# Altium PCB PDB_board.PcbDoc
Units mm, origin at the board's own origin, x right, y up, seen from the top; angles counter-clockwise.
Board outline 70 x 52 mm, 2 copper layers (Top Layer, Bottom Layer); 34 components, 21 nets, 124 pads, 15 vias.
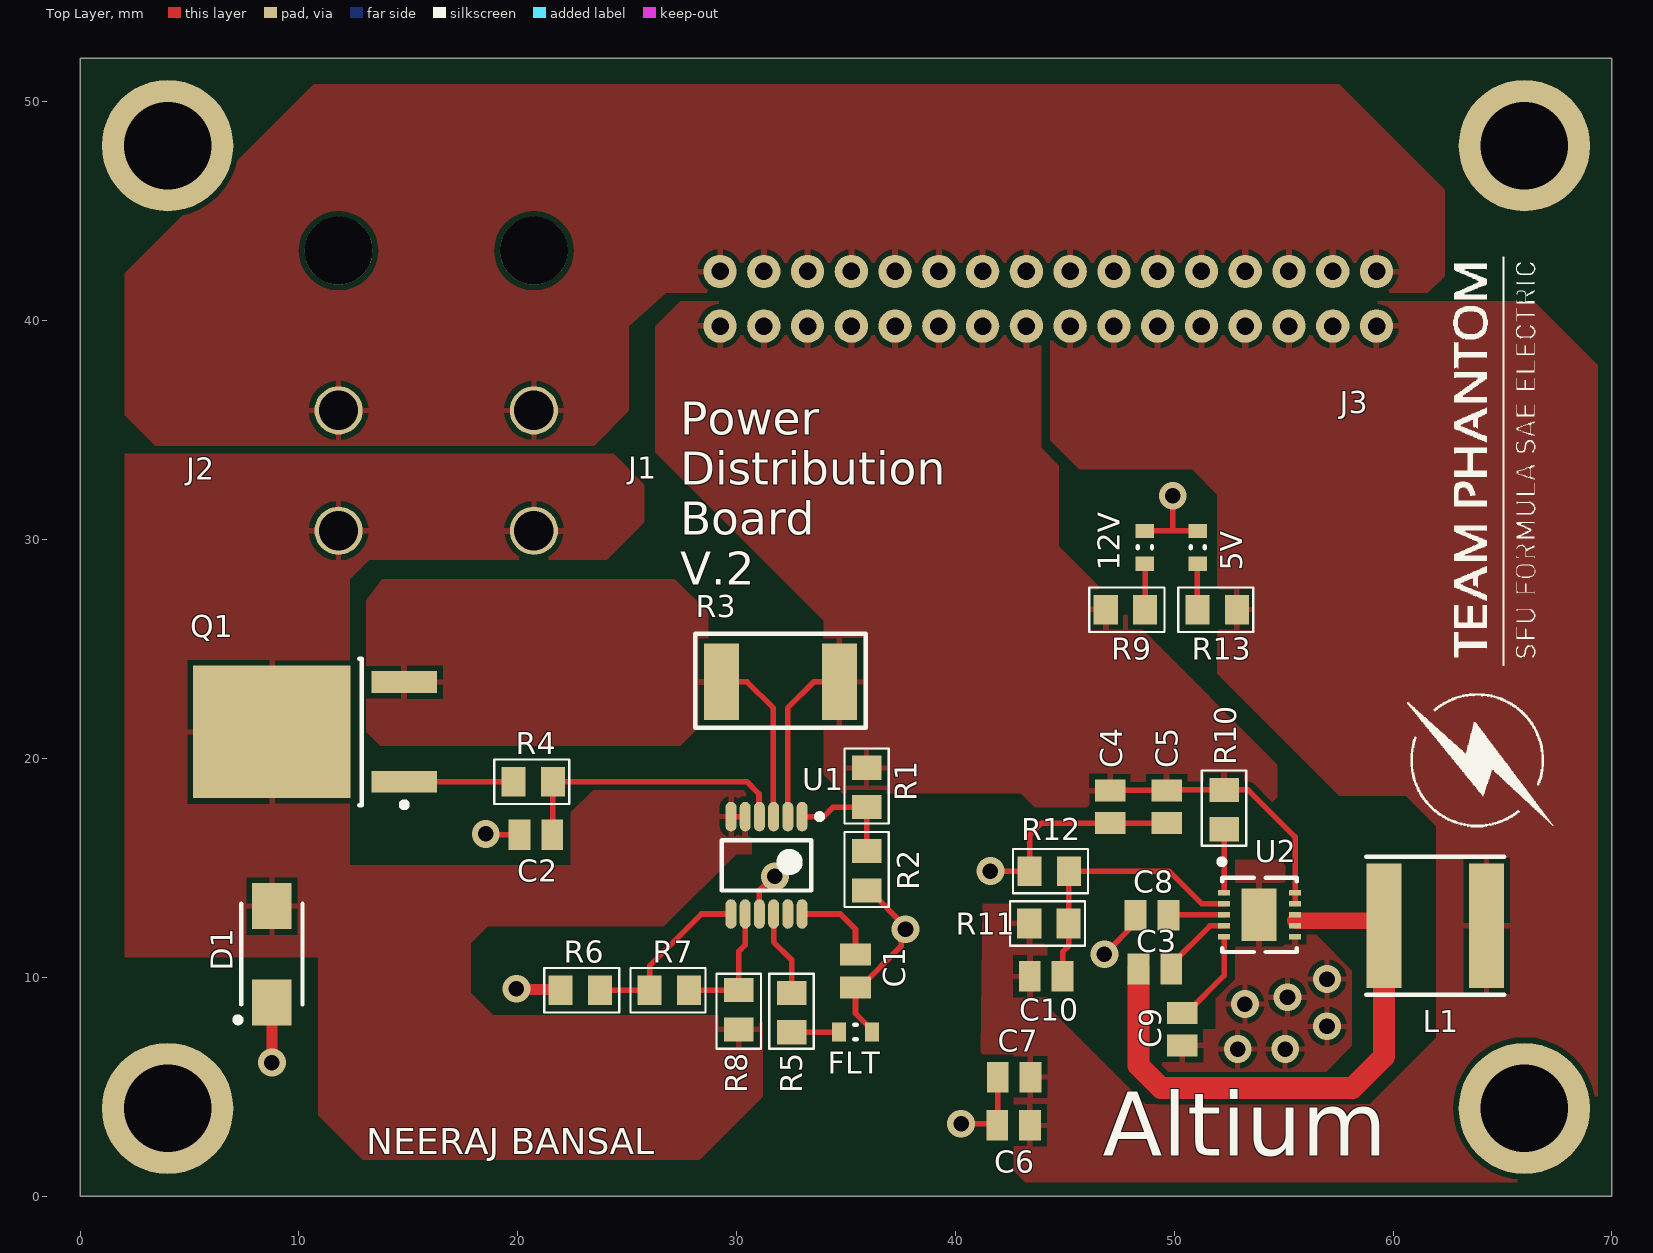
[diagram p0: Top Layer view]
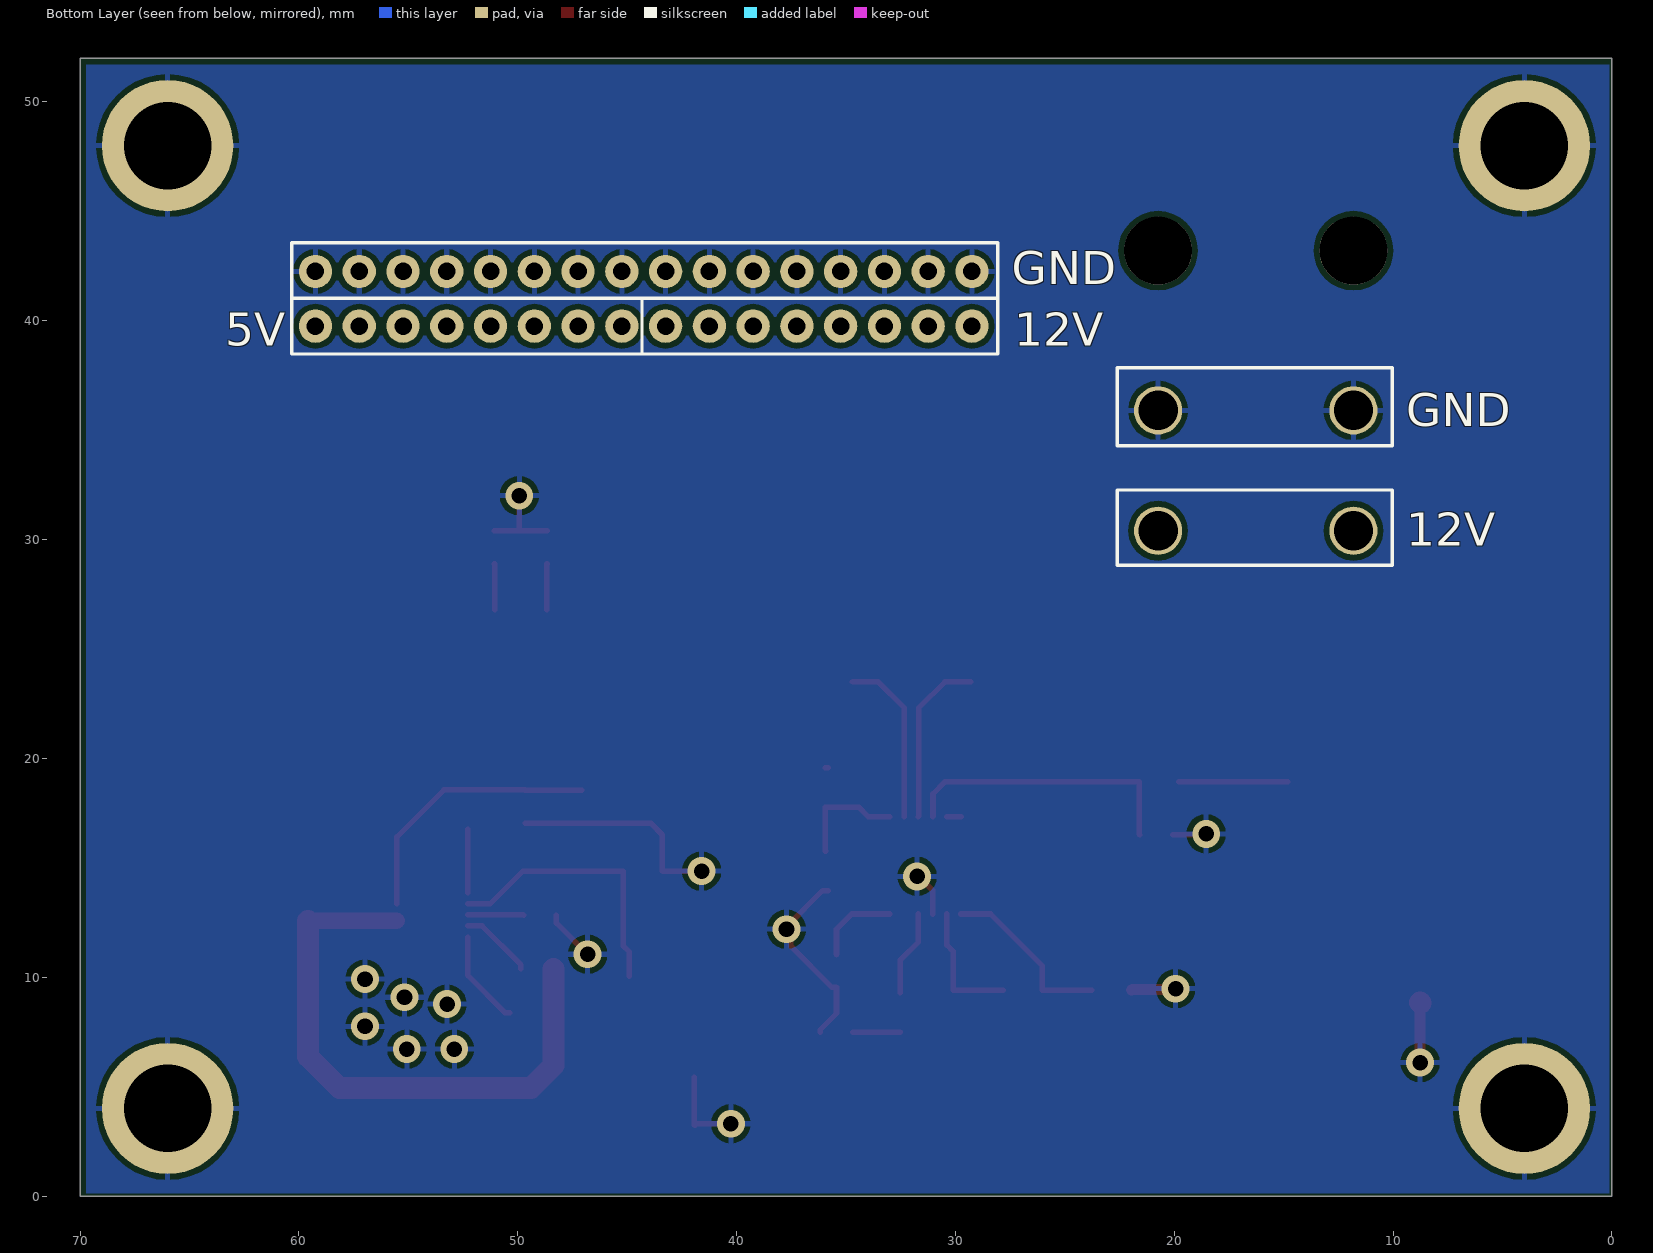
[diagram p1: Bottom Layer view, seen from below]
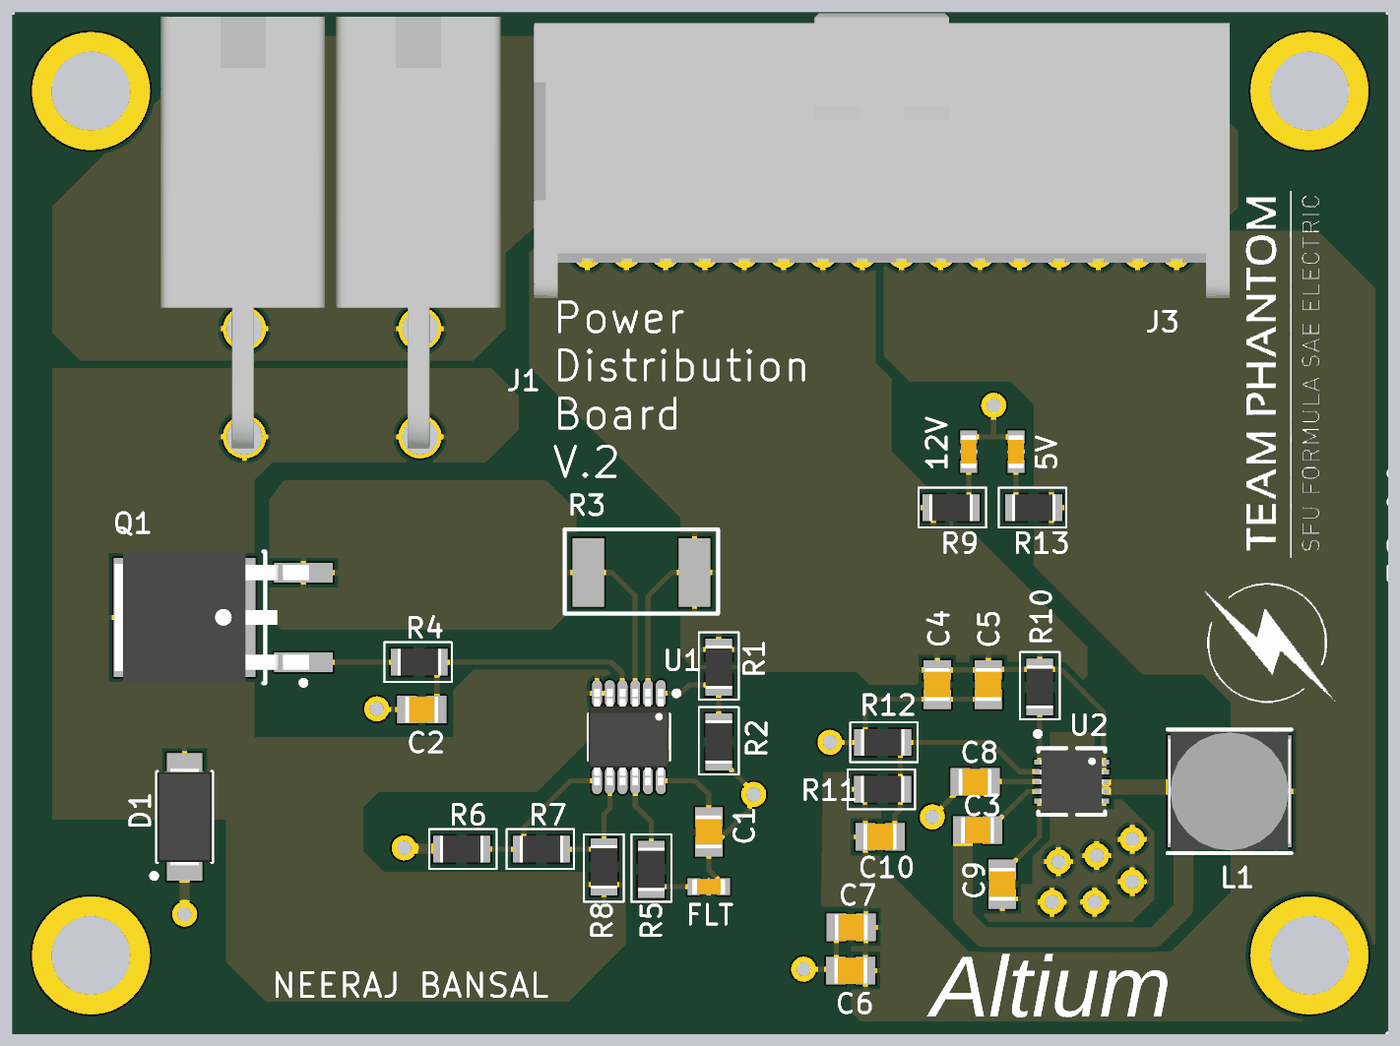
[diagram p2: 3D render of the assembled board from above, using the file's embedded part models]

## Layer stack, top to bottom
Top Solder: solder mask 0.0102, Solder Resist, Dk 3.5
Top Layer: signal copper 0.0356
Dielectric 1: dielectric 0.32, FR-4, Dk 4.8
Bottom Layer: signal copper 0.0356
Bottom Solder: solder mask 0.0102, Solder Resist, Dk 3.5

## Board outline
0,0 0,52 70,52 70,0

## Design rules (kind name [scope] priority, off if disabled: settings)
Clearance [All] p1: gap=0.254 ignorepadtopadclearanceinfootprint=FALSE except(0: Arc-Hole Track-Hole SMDPad-Hole THPad-Hole Via-Hole Fill-Hole Poly-Hole Region-Hole Text-Hole; 0.025: SMDPad-SMDPad; 0.1: Arc-Arc Arc-Track Arc-SMDPad Track-Track Track-SMDPad)
PolygonConnect [All] p1: connectstyle=Relief reliefconductorwidth=0.254 reliefentries=4 polygonreliefangle="90 Angle" airgapwidth=0.254
RoutingVias [All] p1: holewidth=0.711 width=1.27 viastyle="Through Hole" minholewidth=0.711 minwidth=1.27 maxholewidth=0.711 maxwidth=1.27
SolderMaskExpansion [All] p1: expansion=0.102
Width [All] p1: maxlimit=2 minlimit=0.254 preferedwidth=0.254 bottomlayer_maxwidth=0.254 minimp=50.000000 maximp=50.000000 favimp=50.000000
30 further rules are at their usual default settings.

## Classes and differential pairs
net class J3_Nets: 5V_OUT 12V_OUT GND
net class U2_Nets: 12V_OUT BOOTSTRAP_5V EN_5V FB_5V GND SS_5V SW_5V VREG_5V
net class U1_Nets: 12V_OUT +12V FB FLT GND IC_GATE NetU1_11 OV SNS TMR UV
net class R13_Nets: 5V_OUT NetLED3_1
net class R12_Nets: FB_5V GND
net class R11_Nets: 5V_OUT FB_5V
net class R10_Nets: 12V_OUT EN_5V
net class R9_Nets: 12V_OUT NetLED2_1
net class R8_Nets: +12V UV
net class R7_Nets: OV UV
net class R6_Nets: GND OV
net class R5_Nets: FLT NetLED1_1
net class R4_Nets: IC_GATE NetQ1_1
net class R3_Nets: 12V_OUT SNS
net class R2_Nets: FB GND
net class R1_Nets: 12V_OUT FB
net class Q1_Nets: +12V NetQ1_1 SNS
net class PDB_design_Nets: 5V_OUT 12V_OUT +12V BOOTSTRAP_5V EN_5V FB FB_5V FET_GATE FLT GND IC_GATE NetJ1_1 NetJ1_2 NetJ2_1 NetJ2_2 NetLED1_1 NetLED2_1 NetLED3_1 NetQ1_1 NetU1_11 OV SNS SS_5V SW_5V TMR UV VREG_5V
net class LED3_Nets: GND NetLED3_1
net class LED2_Nets: GND NetLED2_1
net class LED1_Nets: GND NetLED1_1
net class L1_Nets: 5V_OUT SW_5V
net class J2_Nets: +12V GND NetJ2_1 NetJ2_2
net class J1_Nets: +12V GND NetJ1_1 NetJ1_2
net class D1_Nets: +12V GND
net class C10_Nets: 5V_OUT FB_5V
net class C9_Nets: GND SS_5V
net class C8_Nets: GND VREG_5V
net class C7_Nets: 5V_OUT GND
net class C6_Nets: 5V_OUT GND
net class C5_Nets: 12V_OUT GND
net class C4_Nets: 12V_OUT GND
net class C3_Nets: BOOTSTRAP_5V SW_5V
net class C2_Nets: GND IC_GATE
net class C1_Nets: GND TMR

## Components (designator, comment, footprint, x,y, rotation, side; value= is the part's Value field where it differs from the comment)
5V "GREEN" LED 51.072,29.644 r90 top (schematic designator LED3)
12V "GREEN" LED 48.659,29.644 r90 top (schematic designator LED2)
C1 "0.1uF" CAPC1613X09N 35.433,10.287 r270 top
C2 "47nF" CAPC1613X09N 20.828,16.51 r0 top
C3 "0.1uF" CAPC1613X09N 49.112,10.376 r0 top
C4 "10uF" CAPC1613X09N 47.068,17.787 r90 top
C5 "10uF" CAPC1613X09N 49.653,17.787 r90 top
C6 "22pF" CAPC1613X09N 42.66,3.231 r180 top
C7 "22pF" CAPC1613X09N 42.684,5.435 r180 top
C8 "1uF" CAPC1613X09N 48.985,12.834 r0 top
C9 "47nF" CAPC1613X09N 50.37,7.622 r90 top
C10 "10pF" CAPC1613X09N 44.147,10.04 r0 top
D1 "TVS DIODE" DIODE_TVS 8.763,11.049 r90 top
FLT "RED" LED 35.433,7.493 r0 top (schematic designator LED1)
J1 "0768250002" MOLEX_2PIN_MEGAFIT 20.738,43.2 r180 top
J2 "0768250002" MOLEX_2PIN_MEGAFIT 11.811,43.2 r180 top
J3 "0559593230" MOLEX_32PIN 44.244,41 r0 top
L1 "3.3uH" IND-6mm 61.927,12.35 r180 top
Q1 "IRLR2908TRLPBF" DPAK 10.713,21.209 r180 top
R1 "42k" R0805 35.941,18.669 r270 top
R2 "5K" R0805 35.941,14.859 r270 top
R3 "0.01OHM" R2512 32.004,23.495 r0 top
R4 "10 ohm" R0805 20.701,18.929 r0 top
R5 "1K" R0805 32.512,8.382 r270 top
R6 "10K" R0805 22.86,9.409 r180 top
R7 "20K" R0805 26.924,9.409 r0 top
R8 "100K" R0805 30.099,8.509 r90 top
R9 "2.2k" R0805 47.77,26.797 r180 top
R10 "10K" R0805 52.275,17.66 r270 top
R11 "124k" R0805 44.274,12.453 r0 top
R12 "22.1k" R0805 44.285,14.849 r180 top
R13 "1K" R0805 51.961,26.797 r0 top
U1 "LT4363" TSOP65P490X110-12N 31.369,15.113 r270 top
U2 "AP65550FN-7" DFN-10 53.9,12.85 r270 top

## Footprints (in the part's own frame and the unit in brackets; to place one, negate y for a bottom-side part, rotate by r counter-clockwise, add the part's x,y. Pads: shape width x height; smd on the part's side, far side on the other; paste and mask are expansions set on the pad)
CAPC1613X09N [mm] "Chip Capacitor, 2-Leads, Body 1.60x1.30mm, IPC Medium Density"
  rect 1x1.4 smd: 1(-0.75,0) 2(0.75,0)
  body extent -0.85,-0.67 0.85,0.67, height 0.9
DFN-10 [mm] "QFN, 10-Leads, Body 3.00x3.00mm, Pitch 0.50mm, Thermal Pad 2.40x1.60mm, IPC Medium Density"
  rect 0.25x0.55 smd: 1(-1,-1.625) 2(-0.5,-1.625) 3(0,-1.625) 4(0.5,-1.625) 5(1,-1.625) 6(1,1.625) 7(0.5,1.625) 8(0,1.625) 9(-0.5,1.625) 10(-1,1.625)
  rect 2.4x1.6 smd: 11(0,-0.025)
  silkscreen extent -2.55,-1.85 1.7,1.7, body extent -1.55,-1.6 1.55,1.6, height 0.63
DIODE_TVS [mm] "Molded Diode, 2-Leads, Body 4.29x2.59mm, IPC Medium Density"
  rect 2.1x1.8 smd: 1(-2.2,0) 2(2.2,0)
  silkscreen extent -3.12,-1.4 2.3,1.67, body extent -2.52,-1.4 2.52,1.4, height 2.29
DPAK [mm] "D-PAK, 3-Pads, Body 6.21x6.73mm (max), IPC Medium Density"
  rect 3x1 smd: 1(-4.1,2.28) 3(-4.1,-2.28)
  rect 7.2x6.05 smd: 4(1.95,0)
  silkscreen extent -4.23,-3.35 -2.05,3.45, body extent -4.39,-3.37 5.52,3.37, height 2.52
IND-6mm [mm] "Precision Wire Wound Inductor, 2-Leads, Body 6.00x6.00mm, IPC Medium Density"
  rect 1.6x5.7 smd: 1(-2.35,0) 2(2.35,0)
  silkscreen extent -3.15,-3.15 3.15,3.15, body extent -3.1,-3 3.1,3, height 4.6
LED [mm] "Chip Capacitor, 2-Leads, Body 1.60x0.70mm, IPC Medium Density"
  rect 0.65x0.85 smd: 1(-0.75,0) 2(0.75,0)
  silkscreen extent -0.05,-0.33 0.05,0.33, body extent -0.85,-0.4 0.85,0.4, height 0.8
MOLEX_2PIN_MEGAFIT [mm]
  round 2.2 hole 1.8: 1(0,7.3) 2(0,12.8)
  round 3.1 hole 3.1: ""(0,0)
  body extent -4.1,-8.58 4.25,13.38, height 14.75
MOLEX_32PIN [mm]
  round 1.524 hole 0.8: 1(-15,1.25) 2(-13,1.25) 3(-11,1.25) 4(-9,1.25) 5(-7,1.25) 6(-5,1.25) 7(-3,1.25) 8(-1,1.25) 9(1,1.25) 10(3,1.25) 11(5,1.25) 12(7,1.25) 13(9,1.25) 14(11,1.25) 15(13,1.25) 16(15,1.25) 17(-15,-1.25) 18(-13,-1.25) 19(-11,-1.25) 20(-9,-1.25) 21(-7,-1.25) 22(-5,-1.25) 23(-3,-1.25) 24(-1,-1.25) 25(1,-1.25) 26(3,-1.25) 27(5,-1.25) 28(7,-1.25) 29(9,-1.25) 30(11,-1.25) 31(13,-1.25) 32(15,-1.25)
  body extent -17.7,-3.55 17.7,10.95, height 11.9
R0805 [mm] "Chip Resistor, 2-Leads, Body 2.09x1.30mm, IPC Medium Density"
  rect 1.1x1.35 smd: 1(-0.9,0) 2(0.9,0)
  silkscreen extent -1.78,-1.02 1.65,1.02, body extent -1.1,-0.67 1.1,0.67, height 0.6
R2512 [mm]
  rect 1.6x3.5 smd: 1(-2.7,0) 2(2.7,0)
  silkscreen extent -3.9,-2.1 3.9,2.2
TSOP65P490X110-12N [mm] "TSOP, 12-Leads, Body 4.04x3.00mm, Pitch 0.65mm, IPC Medium Density"
  oval 1.35x0.5 smd: 1(-2.225,1.625) 2(-2.225,0.975) 3(-2.225,0.325) 4(-2.225,-0.325) 5(-2.225,-0.975) 6(-2.225,-1.625) 7(2.225,-1.625) 8(2.225,-0.975) 9(2.225,-0.325) 10(2.225,0.325) 11(2.225,0.975) 12(2.225,1.625)
  silkscreen extent -2.35,-2.05 1.15,2.55, body extent -2.45,-2.05 2.45,2.05, height 1.1

## Part data
5V 12V: library part 150060VS75000, "LED GREEN CLEAR 0603 SMD", Case/Package=0603, Case Code (Metric)=1608, Colour=Green, Forward Current=30mA, Forward Voltage=2V, Manufacturer="Wurth Electronics", Max Operating Temperature=85°C, Min Operating Temperature=-40°C, Package Quantity=1, Supplier Part Number 1=732-4980-1-ND, Test Current=20mA, Case Code (Imperial)=0603, ComponentLink1Description=http://www.farnell.com/datasheets/1911347.pdf, ComponentLink1URL=http://www.farnell.com/datasheets/1911347.pdf, ComponentLink2Description=https://katalog.we-online.de/led/datasheet/150060VS75000.pdf, ComponentLink2URL=https://katalog.we-online.de/led/datasheet/150060VS75000.pdf, ComponentLink3Description=https://www.distrelec.biz/Web/Downloads/_t/ds/150060VS75000_eng_tds.pdf?mime=application%2Fpdf, ComponentLink3URL=https://www.distrelec.biz/Web/Downloads/_t/ds/150060VS75000_eng_tds.pdf?mime=application%2Fpdf, ComponentLink4Description=http://www.produktinfo.conrad.com/datenblaetter/750000-774999/759431-da-01-en-CHIPLED_0603_W_KL_H_GRUEN_150060VS7500.pdf, ComponentLink4URL=http://www.produktinfo.conrad.com/datenblaetter/750000-774999/759431-da-01-en-CHIPLED_0603_W_KL_H_GRUEN_150060VS7500.pdf, Dominant Wavelength=570nm, Height=0.7mm, Length=1.6mm, Lens Style=Clear,Rectangular, Luminous Intensity=40mcd, Manufacturer Part Number=150060VS75000, Mount="Surface Mount", Number of Pins=2, Packaging="Tape and Reel", Pricing 1="1=0.14, 50=0.129, 100=0.11, 500=0.095 (USD)", REACH SVHC=Unknown, Stock 1=219425, Supplier 1=Digi-Key, Viewing Angle=140°, Wavelength=570nm, Width=0.8mm
C1 C3: library part CL10A104KA8NNNC, "0.1µF ±10% 25V Ceramic Capacitor X5R 0603 (1608 Metric)", Capacitance=47nF, Case/Package=0603, Case Code (Metric)=1608, Dielectric=X7R, Manufacturer=Murata, Manufacturer Part Number=GCM188R71H473KA55D, Max Operating Temperature=125°C, Min Operating Temperature=-55°C, Package Quantity=1, Ratings=AEC-Q200, Tolerance=10%, Voltage=50V, Case Code (Imperial)=0603, Depth=0.8mm, Height=0.8mm, Lead Free="Lead Free", Length=1.6mm, Mount="Surface Mount", Packaging="Tape and Reel", Radiation Hardening=No, REACH SVHC="No SVHC", Supplier 1=Digi-Key, Termination=SMD/SMT, Thickness=0.035inch, Voltage Rating=50V, Voltage Rating (DC)=50V, Width=0.031inch
C2 C9: library part GCM188R71H473KA55D, "CAP CER 0.047UF 50V X7R 0603", Case/Package=0603, Case Code (Metric)=1608, Dielectric=X7R, Manufacturer=Murata, Max Operating Temperature=125°C, Min Operating Temperature=-55°C, Package Quantity=1, Ratings=AEC-Q200, Supplier Part Number 1=490-4934-1-ND, Tolerance=10%, Voltage=50V, Capacitance=47nF, Case Code (Imperial)=0603, Depth=0.8mm, Height=0.8mm, Lead Free="Lead Free", Length=1.6mm, Manufacturer Part Number=GCM188R71H473KA55D, Mount="Surface Mount", Packaging="Tape and Reel", Pricing 1="1=0.16, 10=0.115, 100=0.054, 500=0.03788, 1000=0.03136 (USD)", Radiation Hardening=No, REACH SVHC="No SVHC", Stock 1=40000, Supplier 1=Digi-Key, Termination=SMD/SMT, Thickness=0.035inch, Voltage Rating=50V, Voltage Rating (DC)=50V, Width=0.031inch
C4 C5: library part GRM21BR71A106KA73L, "10µF ±10% 10V Ceramic Capacitor X7R 0805 (2012 Metric)", Capacitance=47nF, Case/Package=0603, Case Code (Metric)=1608, Dielectric=X7R, Manufacturer=Murata, Manufacturer Part Number=GCM188R71H473KA55D, Max Operating Temperature=125°C, Min Operating Temperature=-55°C, Package Quantity=1, Ratings=AEC-Q200, Tolerance=10%, Voltage=50V, Case Code (Imperial)=0603, Depth=0.8mm, Height=0.8mm, Lead Free="Lead Free", Length=1.6mm, Mount="Surface Mount", Packaging="Tape and Reel", Radiation Hardening=No, REACH SVHC="No SVHC", Supplier 1=Digi-Key, Termination=SMD/SMT, Thickness=0.035inch, Voltage Rating=50V, Voltage Rating (DC)=50V, Width=0.031inch
C6 C7: library part CL31B226KPHNNNE, "22µF ±10% 10V Ceramic Capacitor X7R 1206 (3216 Metric)", Capacitance=47nF, Case/Package=0603, Case Code (Metric)=1608, Dielectric=X7R, Manufacturer=Murata, Manufacturer Part Number=GCM188R71H473KA55D, Max Operating Temperature=125°C, Min Operating Temperature=-55°C, Package Quantity=1, Ratings=AEC-Q200, Tolerance=10%, Voltage=50V, Case Code (Imperial)=0603, Depth=0.8mm, Height=0.8mm, Lead Free="Lead Free", Length=1.6mm, Mount="Surface Mount", Packaging="Tape and Reel", Radiation Hardening=No, REACH SVHC="No SVHC", Supplier 1=Digi-Key, Termination=SMD/SMT, Thickness=0.035inch, Voltage Rating=50V, Voltage Rating (DC)=50V, Width=0.031inch
C8: library part CL21B105KBFVPNE, "1µF ±10% 50V Ceramic Capacitor X7R 0805 (2012 Metric)", Capacitance=47nF, Case/Package=0603, Case Code (Metric)=1608, Dielectric=X7R, Manufacturer=Murata, Manufacturer Part Number=GCM188R71H473KA55D, Max Operating Temperature=125°C, Min Operating Temperature=-55°C, Package Quantity=1, Ratings=AEC-Q200, Tolerance=10%, Voltage=50V, Case Code (Imperial)=0603, Depth=0.8mm, Height=0.8mm, Lead Free="Lead Free", Length=1.6mm, Mount="Surface Mount", Packaging="Tape and Reel", Radiation Hardening=No, REACH SVHC="No SVHC", Supplier 1=Digi-Key, Termination=SMD/SMT, Thickness=0.035inch, Voltage Rating=50V, Voltage Rating (DC)=50V, Width=0.031inch
C10: library part C0805C100K5RAC7800, "10pF ±10% 50V Ceramic Capacitor X7R 0805 (2012 Metric)", Capacitance=47nF, Case/Package=0603, Case Code (Metric)=1608, Dielectric=X7R, Manufacturer=Murata, Manufacturer Part Number=GCM188R71H473KA55D, Max Operating Temperature=125°C, Min Operating Temperature=-55°C, Package Quantity=1, Ratings=AEC-Q200, Tolerance=10%, Voltage=50V, Case Code (Imperial)=0603, Depth=0.8mm, Height=0.8mm, Lead Free="Lead Free", Length=1.6mm, Mount="Surface Mount", Packaging="Tape and Reel", Radiation Hardening=No, REACH SVHC="No SVHC", Supplier 1=Digi-Key, Termination=SMD/SMT, Thickness=0.035inch, Voltage Rating=50V, Voltage Rating (DC)=50V, Width=0.031inch
D1: library part SMAJ58A-13-F, "TVS DIODE 58VWM 93.6VC SMA", Breakdown Voltage=64.4V, Capacitance=180pF, Case/Package=SMA, Clamping Voltage=93.6V, Current=43A, Forward Voltage=3.5V, Leakage Current=5uA, Manufacturer=Diodes, Max Breakdown Voltage=71.2V, Max Operating Temperature=150°C, Max Output Current=4.3A, Max Power Dissipation=400W, Max Surge Current=40A, Min Operating Temperature=-55°C, Package Quantity=5000, Power Line Protection=No, Reverse Standoff Voltage=58V, Supplier Part Number 1=SMAJ58A-13-FDIDKR-ND, Test Current=1mA, Composition=Zener, Contact Plating=Matte,Tin, Direction=Unidirectional, Element Configuration=Single, ESD Protection=No, Height=2.3mm, Lead Free="Lead Free", Length=2.92mm, Manufacturer Part Number=SMAJ58A-13-F, Max Reverse Leakage Current=5uA, Min Breakdown Voltage=64.4V, Mount="Surface Mount", Number of Elements=1, Number of Pins=2, Number of Unidirectional Channels=1, Packaging="Tape and Reel", Peak Pulse Current=4.3A, Peak Pulse Power=400W, Polarity=Unidirectional, Power Dissipation=400W, Pricing 1="1=0.41, 10=0.311, 100=0.1937, 500=0.13256, 1000=0.10197 (USD)", Radiation Hardening=No, Reverse Breakdown Voltage=64.4V, Stock 1=387453, Supplier 1=Digi-Key, Termination=SMD/SMT, Voltage=58V, Width=4.6mm, Working Voltage=58V
FLT: library part QTLP600CRTR, "Red  LED Indication - Discrete 2V 0603 (1608 Metric)", Case/Package=0603, Case Code (Metric)=1608, Colour=Green, Forward Current=30mA, Forward Voltage=2V, Manufacturer="Wurth Electronics", Manufacturer Part Number=150060VS75000, Max Operating Temperature=85°C, Min Operating Temperature=-40°C, Package Quantity=1, Test Current=20mA, Case Code (Imperial)=0603, ComponentLink1Description=http://www.farnell.com/datasheets/1911347.pdf, ComponentLink1URL=http://www.farnell.com/datasheets/1911347.pdf, ComponentLink2Description=https://katalog.we-online.de/led/datasheet/150060VS75000.pdf, ComponentLink2URL=https://katalog.we-online.de/led/datasheet/150060VS75000.pdf, ComponentLink3Description=https://www.distrelec.biz/Web/Downloads/_t/ds/150060VS75000_eng_tds.pdf?mime=application%2Fpdf, ComponentLink3URL=https://www.distrelec.biz/Web/Downloads/_t/ds/150060VS75000_eng_tds.pdf?mime=application%2Fpdf, ComponentLink4Description=http://www.produktinfo.conrad.com/datenblaetter/750000-774999/759431-da-01-en-CHIPLED_0603_W_KL_H_GRUEN_150060VS7500.pdf, ComponentLink4URL=http://www.produktinfo.conrad.com/datenblaetter/750000-774999/759431-da-01-en-CHIPLED_0603_W_KL_H_GRUEN_150060VS7500.pdf, Dominant Wavelength=570nm, Height=0.7mm, Length=1.6mm, Lens Style=Clear,Rectangular, Luminous Intensity=40mcd, Mount="Surface Mount", Number of Pins=2, Packaging="Tape and Reel", REACH SVHC=Unknown, Supplier 1=Digi-Key, Viewing Angle=140°, Wavelength=570nm, Width=0.8mm
J1 J2: "CONN_2Position_MEGAFIT Molex Through Hole, Right Angle Tin", Colour=Black, Manufacturer=Molex, Supplier Part Number 1=WM11969-ND, ComponentLink1Description=http://www.molex.com/pdm_docs/ps/PS-76823-100.pdf, ComponentLink1URL=http://www.molex.com/pdm_docs/ps/PS-76823-100.pdf, Connector Type="Male Pin", Contact Plating=Tin, Fastening Type=Ramp, Manufacturer Part Number=0768250002, Mount="Through Hole", Number of Positions=2, Number of Rows=2, Packaging=Tray, Pricing 1="1=1.08, 10=0.946, 25=0.89, 50=0.853, 100=0.816, 250=0.7418, 500=0.6676, 1000=0.5934, 2500=0.5378 (USD)", Row Spacing=0.224inch, Stock 1=2862, Supplier 1=Digi-Key, Termination=Solder
L1: library part 1264EY-3R3N=P3, "IND 3.3µH 6.5A 25.2 mOhm Max Nonstandard", Case/Package=Nonstandard, Current Rating=6.5A, DC Resistance (DCR)=25.2mR, Inductance=3.3uh, Manufacturer=Murata, Manufacturer Part Number=1264EY-3R3N=P3, Supplier Part Number 1=490-10821-1-ND, Test Frequency=100kHz, Tolerance=30%, Composition=Wirewound, Core Material=Ferrite, Height - Seated (Max)=0.198inch, Length=0.248inch, Mount="Surface Mount", Packaging="Tape and Reel", Pricing 1="1=0.51, 10=0.443, 100=0.3163, 500=0.2657 (USD)", Shielding=Shielded, Stock 1=81, Supplier 1=Digi-Key, Width=0.248inch
Q1: "MOSFET N-CH 80V 30A DPAK", Case/Package=DPAK, Continuous Drain Current (ID)=39A, Drain to Source Breakdown Voltage=80V, Drain to Source Resistance=28mR, Gate to Source Voltage (Vgs)=16V, Input Capacitance=1.89nF, Manufacturer="International Rectifier", Max Operating Temperature=175°C, Max Power Dissipation=120W, Min Operating Temperature=-55°C, On-State Resistance=28MR, Package Quantity=1, Supplier Part Number 1=IRLR2908TRLPBFDKR-ND, Threshold Voltage=1V, Drain to Source Voltage (Vdss)=80V, Element Configuration=Single, Fall Time=55ns, Height=2.26mm, Length=6.73mm, Manufacturer Part Number=IRLR2908TRLPBF, Mount="Surface Mount", Nominal Vgs=1V, Number of Elements=1, Number of Pins=3, Packaging="Tape and Reel", Power Dissipation=120W, Pricing 1="1=1.4, 10=1.239, 100=0.9794, 500=0.75958, 1000=0.59966 (USD)", Radiation Hardening=No, Rds On Max=28mR, REACH SVHC="No SVHC", Rise Time=95ns, Stock 1=4490, Supplier 1=Digi-Key, Turn-Off Delay Time=36ns, Turn-On Delay Time=12ns, Width=6.22mm
R1: library part RNCF0805DTE10K0_2_2, Case/Package=0805, Case Code (Metric)=2012, Manufacturer="Stackpole Electronics", Manufacturer Part Number=RNCF0805DTE10K0, Max Operating Temperature=155°C, Max Power Dissipation=125mW, Min Operating Temperature=-55°C, Resistance=10kR, Temperature Coefficient=25ppm/°C, Tolerance=0.5%, Case Code (Imperial)=0805, Composition="Thin Film", Contact Plating=Matte,Tin, Depth=1.25mm, Features="Moisture Resistant", Height=0.026inch, Length=2mm, Military Standard=Not, Mount="Surface Mount", Number of Terminations=2, Packaging="Tape and Reel", Radiation Hardening=No, Width=0.049inch
R2: library part PNM0805E5001BST5, "5 kOhms ±0.1% 0.2W, 1/5W Chip Resistor 0805 (2012 Metric) Anti-Sulfur, Moisture Resistant, Non-Inductive, Non-Magnetic Thin Film", Case/Package=0805, Case Code (Metric)=2012, Manufacturer="Vishay Dale Thin Film", Max Operating Temperature=125°C, Min Operating Temperature=-55°C, Power Rating=200mW, Resistance=5kR, Supplier Part Number 1=1857222, Temperature Coefficient=25ppm/°C, Tolerance=0.1%, Voltage Rating=100V, Case Code (Imperial)=0805, Composition="Thin Film", Height=0.015inch, Length=0.08inch, Manufacturer Part Number=PNM0805E5001BST5, Packaging="Tape and Reel", Pricing 1="1=2.59, 10=1.9, 50=1.53, 100=1.36 (GBP)", Radiation Hardening=No, REACH SVHC=Unknown, Stock 1=1231, Supplier 1=Farnell, Voltage Rating (DC)=100V, Width=0.05inch
R3: library part PE2512FKE7W0R01L, "RES SMD 0.01 OHM 1% 2W 2512", Case/Package=2512, Case Code (Metric)=6432, Manufacturer=Yageo, Max Operating Temperature=170°C, Max Power Dissipation=2W, Min Operating Temperature=-55°C, Resistance=10mR, Temperature Coefficient=50ppm/°C, Tolerance=1%, Case Code (Imperial)=2512, Composition="Metal Film", Features="Automotive AEC-Q200,Moisture Resistant", Height=0.03inch, Lead Free="Lead Free", Length=0.248inch, Manufacturer Part Number=PE2512FKE7W0R01L, Number of Terminations=2, Packaging="Tape and Reel", Supplier 1=Digi-Key, Width=0.122inch
R4: library part RL1220S-100-F, "RES SMD 10 OHM 1% 1/3W 0805", Case/Package=0805, Case Code (Metric)=2012, Manufacturer=Susumu, Max Operating Temperature=125°C, Max Power Dissipation=333mW, Min Operating Temperature=-55°C, Package Quantity=1, Power Rating=250mW, Resistance=10R, Supplier Part Number 1=754-RL1220S-100-F, Temperature Coefficient=200ppm/°C, Tolerance=1%, Voltage Rating (DC)=100V, Case Code (Imperial)=0805, Composition="Thin Film", Height=0.02inch, Lead Free="Lead Free", Length=0.079inch, Manufacturer Part Number=RL1220S-100-F, Number of Pins=2, Number of Terminations=2, Packaging="Tape and Reel", Pricing 1="1=0.34, 10=0.156, 50=0.156, 100=0.07, 1000=0.048, 10000=0.034 (USD)", REACH SVHC=Unknown, Stock 1=32764, Supplier 1=Mouser, Termination=SMD/SMT, Weight=0.000194oz, Width=0.049inch
R5 R13: library part RNCF0805DTE1K00, "1 kOhms ±0.5% 0.125W, 1/8W Chip Resistor 0805 (2012 Metric) Automotive AEC-Q200 Thin Film", Case/Package=0805, Case Code (Metric)=2012, Manufacturer="Stackpole Electronics", Manufacturer Part Number=RNCF0805DTE10K0, Max Operating Temperature=155°C, Max Power Dissipation=125mW, Min Operating Temperature=-55°C, Resistance=10kR, Temperature Coefficient=25ppm/°C, Tolerance=0.5%, Case Code (Imperial)=0805, Composition="Thin Film", Contact Plating=Matte,Tin, Depth=1.25mm, Features="Moisture Resistant", Height=0.026inch, Length=2mm, Military Standard=Not, Mount="Surface Mount", Number of Terminations=2, Packaging="Tape and Reel", Radiation Hardening=No, Supplier 1=Digi-Key, Width=0.049inch
R6 R10: library part RNCF0805DTE10K0, "Res Thin Film 0805 10K Ohm 0.5% 0.1W(1/10W) ±25ppm/C Molded SMD Paper T/R", Case/Package=0805, Case Code (Metric)=2012, Manufacturer="Stackpole Electronics", Max Operating Temperature=155°C, Max Power Dissipation=125mW, Min Operating Temperature=-55°C, Resistance=10kR, Supplier Part Number 1=RNCF0805DTE10K0DKR-ND, Temperature Coefficient=25ppm/°C, Tolerance=0.5%, Case Code (Imperial)=0805, Composition="Thin Film", Contact Plating=Matte,Tin, Depth=1.25mm, Features="Moisture Resistant", Height=0.026inch, Length=2mm, Manufacturer Part Number=RNCF0805DTE10K0, Military Standard=Not, Mount="Surface Mount", Number of Terminations=2, Packaging="Tape and Reel", Pricing 1="1=0.17, 10=0.14, 100=0.0546, 1000=0.02287, 2500=0.02096 (USD)", Radiation Hardening=No, Stock 1=377154, Supplier 1=Digi-Key, Width=0.049inch
R7: library part RNCF0805DTE20K0, "20 kOhms ±0.5% 0.125W, 1/8W Chip Resistor 0805 (2012 Metric) Automotive AEC-Q200 Thin Film", Case/Package=0805, Case Code (Metric)=2012, Manufacturer="Stackpole Electronics", Manufacturer Part Number=RNCF0805DTE10K0, Max Operating Temperature=155°C, Max Power Dissipation=125mW, Min Operating Temperature=-55°C, Resistance=10kR, Temperature Coefficient=25ppm/°C, Tolerance=0.5%, Case Code (Imperial)=0805, Composition="Thin Film", Contact Plating=Matte,Tin, Depth=1.25mm, Features="Moisture Resistant", Height=0.026inch, Length=2mm, Military Standard=Not, Mount="Surface Mount", Number of Terminations=2, Packaging="Tape and Reel", Radiation Hardening=No, Supplier 1=Digi-Key, Width=0.049inch
R8: library part ERA-6AEB104V, "Res Thin Film 0805 100K Ohm 0.1% 0.125W(1/8W) ±25ppm/C Molded SMD Automotive Punched T/R", Case/Package=0805, Case Code (Metric)=2012, Manufacturer=Panasonic, Max Operating Temperature=155°C, Max Power Dissipation=125mW, Min Operating Temperature=-55°C, Package Quantity=1, Resistance=100kR, Temperature Coefficient=25ppm/°C, Tolerance=0.1%, Voltage Rating=100V, Case Code (Imperial)=0805, Composition="Thin Film", Contact Plating=Tin, Depth=1.25mm, Features="Automotive AEC-Q200", Height=0.5mm, Lead Free="Lead Free", Length=2mm, Manufacturer Part Number=ERA-6AEB104V, Military Standard=Not, Mount="Surface Mount", Number of Pins=2, Number of Terminations=2, Packaging="Tape and Reel", Power Rating=125mW, Pricing 1="1=0.324, 10=0.2241, 25=0.2017, 100=0.1064, 250=0.0956, 500=0.0945, 1000=0.0477, 3000=0.0408 (USD)", Radiation Hardening=No, REACH SVHC="No SVHC", Stock 1=2428, Supplier 1=Arrow, Supplier Part Number 1=ERA-6AEB104V, Termination=Solder, Voltage Rating (DC)=100V, Width=1.25mm
R9: library part RC0805FR-072K2L, "2.2 kOhms ±1% 0.125W, 1/8W Chip Resistor 0805 (2012 Metric) Moisture Resistant Thick Film", Case/Package=0805, Case Code (Metric)=2012, Manufacturer="Stackpole Electronics", Manufacturer Part Number=RNCF0805DTE10K0, Max Operating Temperature=155°C, Max Power Dissipation=125mW, Min Operating Temperature=-55°C, Resistance=10kR, Temperature Coefficient=25ppm/°C, Tolerance=0.5%, Case Code (Imperial)=0805, Composition="Thin Film", Contact Plating=Matte,Tin, Depth=1.25mm, Features="Moisture Resistant", Height=0.026inch, Length=2mm, Military Standard=Not, Mount="Surface Mount", Number of Terminations=2, Packaging="Tape and Reel", Radiation Hardening=No, Supplier 1=Digi-Key, Width=0.049inch
R11: library part ERA-6AEB1243V, "124 kOhms ±0.1% 0.125W, 1/8W Chip Resistor 0805 (2012 Metric) Automotive AEC-Q200 Thin Film", Case/Package=0805, Case Code (Metric)=2012, Manufacturer="Stackpole Electronics", Manufacturer Part Number=RNCF0805DTE10K0, Max Operating Temperature=155°C, Max Power Dissipation=125mW, Min Operating Temperature=-55°C, Resistance=10kR, Temperature Coefficient=25ppm/°C, Tolerance=0.5%, Case Code (Imperial)=0805, Composition="Thin Film", Contact Plating=Matte,Tin, Depth=1.25mm, Features="Moisture Resistant", Height=0.026inch, Length=2mm, Military Standard=Not, Mount="Surface Mount", Number of Terminations=2, Packaging="Tape and Reel", Radiation Hardening=No, Supplier 1=Digi-Key, Width=0.049inch
R12: library part RNCF0805DTE22K1, "22.1 kOhms ±0.5% 0.125W, 1/8W Chip Resistor 0805 (2012 Metric) Automotive AEC-Q200 Thin Film", Case/Package=0805, Case Code (Metric)=2012, Manufacturer="Stackpole Electronics", Manufacturer Part Number=RNCF0805DTE10K0, Max Operating Temperature=155°C, Max Power Dissipation=125mW, Min Operating Temperature=-55°C, Resistance=10kR, Temperature Coefficient=25ppm/°C, Tolerance=0.5%, Case Code (Imperial)=0805, Composition="Thin Film", Contact Plating=Matte,Tin, Depth=1.25mm, Features="Moisture Resistant", Height=0.026inch, Length=2mm, Military Standard=Not, Mount="Surface Mount", Number of Terminations=2, Packaging="Tape and Reel", Radiation Hardening=No, Supplier 1=Digi-Key, Width=0.049inch
U1: library part LT4363CMS-2#PBF, "IC SURGE STOPPER HV 12-MSOP", Case/Package=MSOP, Clamping Voltage=27V, Manufacturer="Analog Devices / Linear Technology", Max Operating Temperature=70°C, Max Supply Voltage=80V, Min Operating Temperature=0°C, Min Supply Voltage=4V, Package Quantity=37, Supplier Part Number 1=LT4363CMS-2#PBF-ND, Lead Free="Lead Free", Manufacturer Part Number=LT4363CMS-2#PBF, Number of Circuits=1, Number of Pins=12, Packaging=Rail/Tube, Pricing 1="1=5.41, 25=3.6108, 100=3.0702 (USD)", REACH SVHC="No SVHC", Stock 1=1640, Supplier 1=Digi-Key, Working Voltage=80V
U2: "IC BUCK SYNC 5A, 18V VIN MAX 650kHz COT Step-Down Conv", Manufacturer=Diodes, Max Input Voltage=18V, Max Operating Temperature=85°C, Max Output Voltage=6V, Min Input Voltage=4.5V, Min Operating Temperature=-40°C, Min Output Voltage=760mV, Operating Supply Current=900uA, Output Current=5A, Package Quantity=3000, Supplier Part Number 1=AP65550FN-7DICT-ND, Switching Frequency=650kHz, Lead Free="Lead Free", Manufacturer Part Number=AP65550FN-7, Min Supply Voltage=4.5V, Mount="Surface Mount", Number of Outputs=1, Output Configuration=Positive, Output Type=Adjustable, Output Voltage=6V, Packaging="Tape and Reel", Pricing 1="1=0.77, 10=0.68, 100=0.5212, 500=0.412, 1000=0.3296 (USD)", Stock 1=135, Supplier 1=Digi-Key, Synchronous Rectifier=Yes
J3: Supplier 1=Digi-Key

## Free pads (board coordinates)
  round 6 hole 4: 2(4,4) 2(4,48) 2(66,4) 2(66,48)

## Via types
v1: diameter 1.27, hole 0.711, Top Layer to Bottom Layer, 15 vias

## Nets (pads, with @x,y where several pads share a name; then routed paths per layer and width w, separated by ;. In a path a pad name is that pad's centre, name@x,y a point inside that pad or via, vN(x,y) a via of type N, cw(c..) or ccw(c..) an arc to the next point about the centre after c; other vN are vias at no path point)
5V_OUT: C6.1 C7.1 C10.1 J3.25 J3.26 J3.27 J3.28 J3.29 J3.30 J3.31 J3.32 L1.1 R11.1 R13.2
12V_OUT: C4.2 C5.2 J3.17 J3.18 J3.19 J3.20 J3.21 J3.22 J3.23 J3.24 R1.1 R3.2 R9.2 R10.1 U1.2 U2.9 U2.10 | length 20.4
  Top Layer w0.254: U1.2 32.344,22.289 32.333,22.3 33.528,23.495 R3.2 ; R1.1@35.816,19.569 R1.1 ; C4.2 C5.2 49.676,18.56 R10.1 53.371,18.56 55.525,16.406 U2.10 U2.9
+12V: D1.2 J1.2 J2.2 Q1.4 R8.1 U1.5 U1.6 | length 0.7
  Top Layer w0.254: U1.6 U1.5
BOOTSTRAP_5V: C3.2 U2.4 | length 3.3
  Top Layer w0.254: C3.2 49.862,10.576 51.628,12.342 U2.4@52.275,12.342
EN_5V: R10.2 U2.1 | length 2.9
  Top Layer w0.254: U2.1 R10.2
FB: R1.2 R2.1 U1.1 | length 5.1
  Top Layer w0.254: U1.1 33.986,17.338 34.417,17.769 R1.2 35.941,15.771 35.935,15.765 R2.1
FB_5V: C10.2 R11.2 R12.1 U2.2 | length 12.6
  Top Layer w0.254: C10.2 44.897,11.149 45.185,11.437 45.185,12.442 R11.2 45.185,12.464 R12.1 49.761,14.849 51.259,13.35 U2.2
FLT: R5.1 U1.10 | length 3.9
  Top Layer w0.254: U1.10 31.694,11.613 32.512,10.795 R5.1
GND: 5V.2 12V.2 C1.2 C2.1 C4.1 C5.1 C6.2 C7.2 C8.1 C9.1 D1.1 FLT.2 J1.1 J2.1 J3.1 J3.2 J3.3 J3.4 J3.5 J3.6 J3.7 J3.8 J3.9 J3.10 J3.11 J3.12 J3.13 J3.14 J3.15 J3.16 pad.2 R2.2 R6.2 R12.2 U1.9 U2.6 U2.11 | length 37.5
  Top Layer w0.254: v1(18.542,16.55) 18.582,16.51 C2.1 ; U1.9 31.044,13.974 31.623,14.553 31.698,14.553 v1(31.75,14.605) ; R2.2@35.816,13.959 R2.2 36.066,13.959 37.719,12.306 v1(37.719,12.192) 37.525,11.998 37.525,11.429 35.633,9.537 C1.2 35.433,8.343 36.183,7.593 FLT.2 ; v1(40.259,3.302) 41.839,3.302 C6.2 41.934,3.255 C7.2 ; v1(41.6,14.849) R12.2 43.397,14.861 43.397,16.51 43.924,17.037 C4.1 C5.1 ; v1(46.807,11.049) 48.235,12.477 C8.1 ; 12V.2 49.866,30.394 ; v1(49.929,32.004) 49.929,30.457 49.866,30.394 ; 5V.2 49.866,30.394
  Top Layer w0.508: v1(8.763,6.096) D1.1 ; v1(19.939,9.473) 19.971,9.441 21.928,9.441 R6.2
  Top Layer w1: D1.1@8.734,8.82 D1.1
  other v1: 52.9,6.715 55.069,6.715 56.982,7.754 53.231,8.77 55.174,9.083 56.982,9.913
IC_GATE: C2.2 R4.2 U1.4 | length 13.1
  Top Layer w0.254: C2.2 21.601,16.533 R4.2 30.474,18.929 31.025,18.378 31.025,17.357 U1.4
NetLED1_1: FLT.1 R5.2 | length 2.2
  Top Layer w0.254: R5.2 32.523,7.493 FLT.1
NetLED2_1: 12V.1 R9.1 | length 2.1
  Top Layer w0.254: 12V.1 48.67,28.883 R9.1
NetLED3_1: 5V.1 R13.1 | length 2.1
  Top Layer w0.254: R13.1 51.061,28.883 5V.1
NetQ1_1: Q1.1 R4.1 | length 5
  Top Layer w0.254: Q1.1 R4.1
OV: R6.1 R7.1 U1.7 | length 8.1
  Top Layer w0.254: R6.1 R7.1 26.024,10.519 28.393,12.888 U1.7
SNS: Q1.3 R3.1 U1.3 | length 7.8
  Top Layer w0.254: R3.1 30.48,23.495 31.683,22.292 31.683,17.349 U1.3
SS_5V: C9.2 U2.5 | length 4.4
  Top Layer w0.254: C9.2 50.57,8.372 52.275,10.077 U2.5@52.275,11.834
SW_5V: C3.1 L1.2 U2.7 U2.8 | length 26.9
  Top Layer w0.762: 55.525,12.575 L1.2@59.577,12.575
  Top Layer w1: C3.1 48.362,5.969 49.402,4.929 58.142,4.929 59.577,6.364 L1.2 L1.2@59.577,12.575
TMR: C1.1 U1.12 | length 3.9
  Top Layer w0.254: U1.12 34.737,12.888 35.433,12.192 C1.1
UV: R7.2 R8.2 U1.8 | length 5.9
  Top Layer w0.254: R7.2 R8.2 30.099,11.176 30.394,11.471 U1.8
VREG_5V: C8.2 U2.3 | length 2.5
  Top Layer w0.254: C8.2 49.751,12.85 U2.3
pads on no net: J1. J2. U1.11

## Polygon pours and split planes (outlines as drawn)
GND on Top Layer "Top Layer-GND" (solid, pour order 48): 26.797,41.275 61.595,41.275 62.357,42.037 62.357,45.974 57.531,50.8 10.668,50.8 2.032,42.164 2.032,35.687 3.429,34.29 23.495,34.29 25.082,35.877 25.082,39.75
12V_OUT on Top Layer "Top Layer-12V_OUT" (solid, pour order 46): 42.979,18.415 43.631,17.763 54.238,17.763 54.708,18.233 54.708,19.712 44.731,29.689 44.731,33.375 43.924,34.182 43.924,40.367 43.397,40.894 27.433,40.894 26.289,39.75 26.289,33.982 33.986,26.285 33.986,19.257 34.828,18.415
5V_OUT on Top Layer "Top Layer-5V_OUT" (solid, remove dead copper, pour order 44): 44.196,13.35 41.244,13.35 41.148,6.477 42.672,6.477 42.672,1.143 43.18,0.635 68.326,0.635 69.342,1.651 69.342,37.973 66.421,40.894 44.958,40.894 44.323,40.259 44.323,34.544 45.657,33.21 50.815,33.21 51.968,32.057 51.968,23.857 57.537,18.288 60.579,18.288 61.976,16.891 61.976,7.239 58.928,4.191 48.681,4.191 44.196,8.676
+12V on Top Layer "GND" (solid, pour order 32): 2.032,33.909 24.384,33.909 25.781,32.512 25.781,30.792 24.072,29.083 13.208,29.083 12.319,28.194 12.319,11.938 11.303,10.922 2.032,10.922
no net on Top Layer "GND" (solid, pour order 10): 55.245,31.75
GND on Top Layer "GND" (solid, pour order 6): 52.783,15.374 54.815,15.374 55.069,15.12 55.069,11.998 56.414,11.998 58.117,10.294 58.117,6.865 56.847,5.595 49.608,5.595 48.846,6.357 48.846,7.349 49.124,7.627 51.894,7.627 51.894,9.024 52.783,9.913
+12V on Top Layer "GND" (solid, pour order 4): 11.987,15.113 18.623,15.113 22.433,15.113 22.433,17.526 23.449,18.542 30.434,18.542 30.688,18.288 30.688,15.621 29.982,15.621 26.68,12.319 18.623,12.319 17.861,11.557 17.861,9.282 18.888,8.255 30.942,8.255 31.196,8.001 31.196,4.525 28.322,1.651 12.908,1.651 10.876,3.683 10.876,14.224
SNS on Top Layer "GND" (solid, pour order 2): 13.081,27.22 13.081,21.209 13.716,20.574 27.432,20.574 28.702,21.844 28.702,26.67 27.178,28.194 13.811,28.194
GND on Bottom Layer "GND" (solid, pour order 14): 0.127,51.689 0.127,0.127 69.723,0.127 69.723,51.689

## Silkscreen, mask and mechanical layers (free items; w line width, h text height)
Top Overlay:
  drawing of 36 lines, arcs and shapes, not listed
  text "Power / Distribution / Board / V.2" at 27.432,27.94 h1.52
  text "NEERAJ BANSAL" at 13.081,1.905 h1.2
  text "Altium" at 46.736,0.889 h5
Bottom Overlay:
  lines w0.15: 28.067,40.894 28.067,43.561 60.325,43.561 60.325,40.894 ; 44.323,38.481 44.323,41.021 ; 44.323,38.481 60.325,38.481 60.325,41.021 44.323,41.021 ; 44.323,38.481 28.067,38.481 28.067,41.021 44.323,41.021 ; 10.033,28.829 10.033,32.258 22.606,32.258 22.606,28.829 10.033,28.829 ; 10.033,34.29 22.606,34.29 22.606,37.846 10.033,37.846 10.033,34.29
  text "GND" at 27.432,41.656 h1.52
  text "12V" at 27.305,38.862 h1.52
  text "5V" at 63.373,38.862 h1.52
  text "GND" at 9.398,35.179 h1.52
  text "12V" at 9.398,29.718 h1.52
Mechanical 13:
  the board outline again, w0.254

## Dimensions
70,52 to 0,52 on Top Overlay
70,52 to 70,0 on Top Overlay